# Altium PCB controller_V1.0.PcbDoc (part 4 of 8)
Units mm, origin at the board's own origin, x right, y up, seen from the top; angles counter-clockwise.
Board outline 284.13 x 175.13 mm, 4 copper layers (Top Layer, GND, VCC, Bottom Layer); 496 components, 415 nets, 1682 pads, 750 vias.
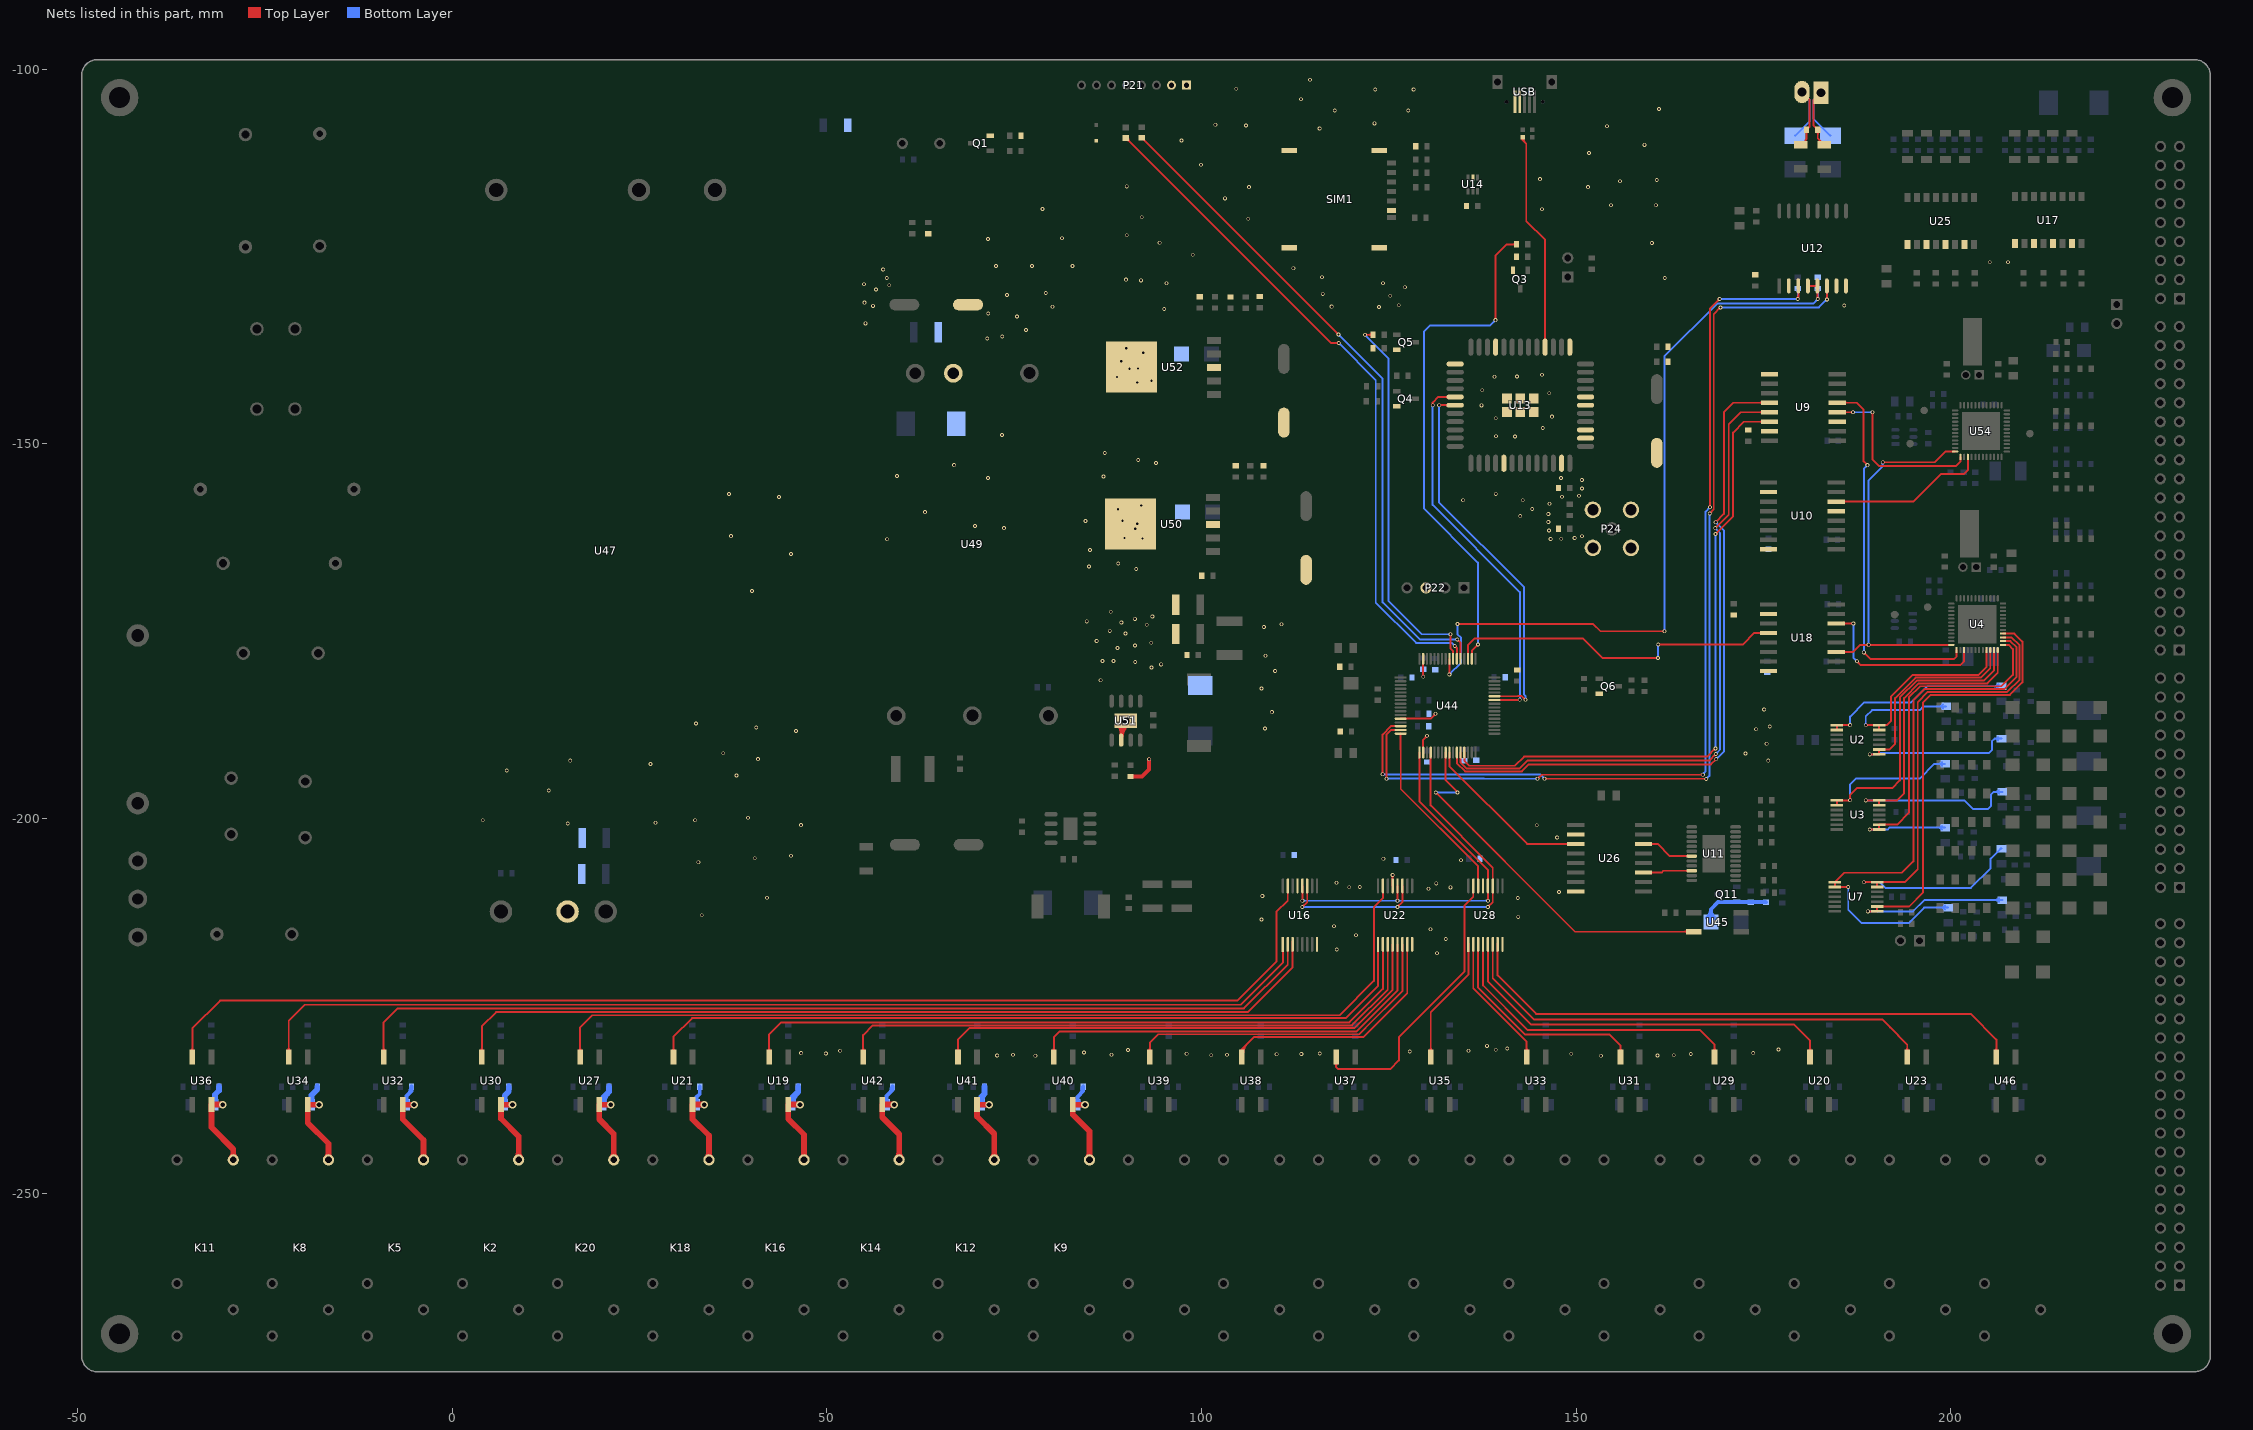
[diagram p6: the nets of this part, all layers, seen from the top]

## Via types
v1: diameter 0.508, hole 0.305, Top Layer to Bottom Layer, tented both sides, 596 vias
v2: diameter 1.016, hole 0.635, Top Layer to Bottom Layer, tented both sides, 65 vias
v3: diameter 0.6, hole 0.3, Top Layer to Bottom Layer, 50 vias
v4: diameter 0.762, hole 0.508, Top Layer to Bottom Layer, tented both sides, 29 vias
v5: diameter 2.032, hole 1.524, Top Layer to Bottom Layer, tented both sides, 4 vias
v6: diameter 3.048, hole 2.032, Top Layer to Bottom Layer, tented both sides, 3 vias
v7: diameter 1.5, hole 1, Top Layer to Bottom Layer, 2 vias
v8: diameter 2.54, hole 1.778, Top Layer to Bottom Layer, tented both sides, 1 vias

## Nets (pads, with @x,y where several pads share a name; then routed paths per layer and width w, separated by ;. In a path a pad name is that pad's centre, name@x,y a point inside that pad or via, vN(x,y) a via of type N, cw(c..) or ccw(c..) an arc to the next point about the centre after c; other vN are vias at no path point) (continued)
DO_10: C109.1 D66.2 K9.5 U40.4 | length 17
  Top Layer w0.762: U40.4@82.832,-238.176 82.832,-239.55 85.042,-241.76 K9.5@85.042,-245.567 ; U40.4@82.858,-238.201 v2(84.454,-238.201) ; K9.5@84.781,-245.306 ccw(c84.151,-244.676) 85.042,-244.676 ccw(c85.932,-244.676) K9.5@85.302,-245.306
  Bottom Layer w0.508: D66.2@83.294,-237.763 ccw(c82.96,-237.428) 83.433,-237.428 ccw(c83.906,-237.428) D66.2@83.571,-237.763 ; D66.2@83.433,-238.201 83.433,-237.191 84.223,-236.401 C109.1@84.223,-235.788 ; 83.702,-236.922 ccw(c82.675,-235.896) C109.1@84.127,-235.865
  Bottom Layer w0.762: D66.2@83.433,-238.201 v2(84.454,-238.201)
DO_11: C110.1 D67.2 K12.5 U41.4 | length 16.2
  Top Layer w0.762: U41.4@70.044,-238.176 70.044,-239.792 72.344,-242.092 K12.5@72.344,-245.567 ; U41.4@70.07,-238.201 v2(71.652,-238.201) ; K12.5@72.083,-245.306 ccw(c71.453,-244.676) 72.344,-244.676 ccw(c73.235,-244.676) K12.5@72.605,-245.306
  Bottom Layer w0.762: D67.2@70.699,-237.887 cw(c71.932,-237.623) 71.04,-236.732 ; C110.1@71.04,-235.788 71.04,-236.732 ; v2(71.652,-238.201) D67.2@70.631,-238.201 70.631,-237.141 71.04,-236.732
DO_12: C111.1 D68.2 K14.5 U42.4 | length 16.7
  Top Layer w0.762: v2@58.952,-238.176 U42.4@57.383,-238.176 57.383,-239.882 59.646,-242.145 K14.5@59.646,-245.567 ; K14.5@59.385,-245.306 ccw(c58.755,-244.676) 59.646,-244.676 ccw(c60.537,-244.676) K14.5@59.907,-245.306
  Bottom Layer w0.508: D68.2@57.818,-237.763 ccw(c57.483,-237.428) 57.957,-237.428 ccw(c58.43,-237.428) D68.2@58.095,-237.763 ; D68.2@57.957,-238.201 57.957,-237.039 58.747,-236.249 C111.1@58.747,-235.788 ; 58.31,-236.686 ccw(c57.487,-235.863) C111.1@58.651,-235.863
  Bottom Layer w0.762: D68.2@57.957,-238.201 v2(58.978,-238.201)
DO_13: C87.1 D50.2 K16.5 U19.4 | length 16.3
  Top Layer w0.762: v2@46.381,-238.176 U19.4@44.825,-238.176 44.825,-240.075 46.948,-242.198 K16.5@46.948,-245.567 ; K16.5@46.687,-245.306 ccw(c46.058,-244.676) 46.948,-244.676 ccw(c47.839,-244.676) K16.5@47.209,-245.306
  Bottom Layer w0.762: D50.2@45.455,-237.901 cw(c47.156,-237.901) 45.953,-236.698 ; C87.1@46.176,-235.788 46.176,-236.476 45.386,-237.266 D50.2@45.386,-238.201 v2(46.407,-238.201)
DO_14: C89.1 D77.2 K18.5 U21.4 | length 15.6
  Top Layer w0.762: v2(33.629,-238.201) 33.603,-238.176 U21.4@32.061,-238.176 32.061,-240.137 34.251,-242.327 K18.5@34.251,-245.567 ; K18.5@33.99,-245.306 ccw(c33.36,-244.676) 34.251,-244.676 ccw(c35.141,-244.676) K18.5@34.512,-245.306
  Bottom Layer w0.508: D77.2@32.469,-237.763 ccw(c32.134,-237.428) 32.607,-237.428 ccw(c33.081,-237.428) D77.2@32.746,-237.763 ; D77.2@32.607,-238.201 32.607,-237.191 33.016,-236.782 C89.1@33.016,-235.788
  Bottom Layer w0.762: D77.2@32.607,-238.201 v2(33.629,-238.201)
DO_15: C92.1 D54.2 K20.5 U27.4 | length 16.2
  Top Layer w0.762: U27.4@19.603,-238.176 19.603,-240.151 21.553,-242.101 K20.5@21.553,-245.567 ; U27.4@19.628,-238.201 v2(21.157,-238.201) ; K20.5@21.292,-245.306 ccw(c20.662,-244.676) 21.553,-244.676 ccw(c22.444,-244.676) K20.5@21.814,-245.306
  Bottom Layer w0.762: D54.2@20.205,-237.901 cw(c21.901,-237.901) 20.702,-236.702 ; C92.1@20.926,-235.788 20.926,-236.478 20.136,-237.268 D54.2@20.136,-238.201 v2(21.157,-238.201)
DO_16: C94.1 D56.2 K2.5 U30.4 | length 14.9
  Top Layer w0.762: U30.4@6.484,-238.176 6.484,-240.062 8.855,-242.434 K2.5@8.855,-245.567 ; U30.4@6.509,-238.201 v2(8.025,-238.201) ; K2.5@8.594,-245.306 ccw(c7.964,-244.676) 8.855,-244.676 ccw(c9.746,-244.676) K2.5@9.116,-245.306
  Bottom Layer w0.762: C94.1@7.54,-235.788 7.54,-236.427 7.004,-236.963 D56.2@7.004,-238.201 v2(8.025,-238.201)
DO_17: C97.1 D58.2 K5.5 U32.4 | length 16.9
  Top Layer w0.762: U32.4@-6.632,-238.176 -6.632,-240.129 -3.843,-242.918 K5.5@-3.843,-245.567 ; U32.4@-6.607,-238.201 v2(-5.104,-238.201) ; K5.5@-4.103,-245.306 ccw(c-4.733,-244.676) -3.843,-244.676 ccw(c-2.952,-244.676) K5.5@-3.582,-245.306
  Bottom Layer w0.508: D58.2@-6.264,-237.763 ccw(c-6.599,-237.428) -6.126,-237.428 ccw(c-5.652,-237.428) D58.2@-5.987,-237.763 ; D58.2@-6.126,-238.201 -6.126,-237.037 -5.463,-236.374 C97.1@-5.463,-235.788 ; -5.87,-236.782 ccw(c-6.644,-236.008) C97.1@-5.558,-235.875
  Bottom Layer w0.762: D58.2@-6.126,-238.201 v2(-5.104,-238.201)
DO_18: C101.1 D60.2 K8.5 U34.4 | length 15.2
  Top Layer w0.762: U34.4@-19.296,-238.176 -19.296,-240.648 -16.54,-243.403 K8.5@-16.54,-245.567 ; U34.4@-19.27,-238.201 v2(-17.781,-238.201) ; K8.5@-16.801,-245.306 ccw(c-17.431,-244.676) -16.54,-244.676 ccw(c-15.649,-244.676) K8.5@-16.279,-245.306
  Bottom Layer w0.762: C101.1@-18.012,-235.788 -18.012,-236.147 -18.802,-236.937 D60.2@-18.802,-238.201 v2(-17.781,-238.201)
DO_19: C103.1 D62.2 K11.5 U36.4 | length 15.2
  Top Layer w0.762: v2(-30.658,-238.201) -30.683,-238.176 U36.4@-32.159,-238.176 -32.159,-241.221 -29.238,-244.142 K11.5@-29.238,-245.567 ; K11.5@-29.499,-245.306 ccw(c-30.129,-244.676) -29.238,-244.676 ccw(c-28.347,-244.676) K11.5@-28.977,-245.306
  Bottom Layer w0.762: C103.1@-31.143,-235.788 -31.143,-236.324 -31.679,-236.86 D62.2@-31.679,-238.201 v2(-30.658,-238.201)
DO_CTRL_0: U28.7 U46.2 | length 77.7
  Top Layer w0.254: U28.7@139.533,-216.662 139.533,-220.94 144.678,-226.085 202.692,-226.085 206.109,-229.502 U46.2@206.109,-231.851 ; U46.2@205.929,-231.037 ccw(c205.495,-230.603) 206.109,-230.603 ccw(c206.722,-230.603) U46.2@206.288,-231.037
DO_CTRL_1: U23.2 U28.6 | length 69.1
  Top Layer w0.254: U28.6@138.883,-216.662 138.883,-221.357 144.348,-226.822 190.856,-226.822 191.922,-227.889 ; 193.904,-229.87 191.922,-227.889 ; U23.2@194.026,-231.037 ccw(c193.592,-230.603) 194.205,-230.603 ccw(c194.819,-230.603) U23.2@194.385,-231.037 ; U23.2@194.205,-231.851 194.205,-230.172 191.922,-227.889
DO_CTRL_2: U20.2 U28.5 | length 54.5
  Top Layer w0.254: U28.5@138.233,-216.662 138.233,-221.723 144.018,-227.508 179.095,-227.508 181.239,-229.651 U20.2@181.239,-231.851 ; U20.2@181.059,-231.037 ccw(c180.626,-230.603) 181.239,-230.603 ccw(c181.852,-230.603) U20.2@181.418,-231.037
DO_CTRL_3: U28.4 U29.2 | length 42.4
  Top Layer w0.254: U28.4@137.583,-216.662 137.583,-222.292 143.51,-228.219 166.522,-228.219 168.491,-230.188 U29.2@168.491,-231.851 ; U29.2@168.312,-231.037 ccw(c167.878,-230.603) 168.491,-230.603 ccw(c169.104,-230.603) U29.2@168.671,-231.037
DO_CTRL_4: U28.3 U31.2 | length 30.6
  Top Layer w0.254: U28.3@136.933,-216.662 136.933,-222.582 143.18,-228.829 154.457,-228.829 155.93,-230.301 U31.2@155.93,-231.851 ; U31.2@155.75,-231.037 ccw(c155.316,-230.603) 155.93,-230.603 ccw(c156.543,-230.603) U31.2@156.109,-231.037
DO_CTRL_5: U28.2 U33.2 | length 19.1
  Top Layer w0.254: U28.2@136.283,-216.662 136.283,-222.669 143.401,-229.786 U33.2@143.401,-231.851 ; U33.2@143.221,-231.037 ccw(c142.787,-230.603) 143.401,-230.603 ccw(c144.014,-230.603) U33.2@143.58,-231.037
DO_CTRL_6: U28.1 U35.2 | length 18.2
  Top Layer w0.254: U35.2@130.428,-231.037 ccw(c129.994,-230.603) 130.607,-230.603 ccw(c131.22,-230.603) U35.2@130.787,-231.037 ; U35.2@130.607,-231.851 130.607,-225.856 135.633,-220.83 U28.1@135.633,-216.789 U28.1@135.633,-216.662
DO_CTRL_7: U28.15 U37.2 | length 38.7
  Top Layer w0.254: U37.2@117.792,-232.666 cw(c117.358,-233.099) 117.971,-233.099 cw(c118.585,-233.099) U37.2@118.151,-232.666 ; U37.2@117.971,-231.851 117.971,-233.186 118.237,-233.451 125.171,-233.451 126.34,-232.283 126.34,-229.184 135.128,-220.396 135.128,-211.607 136.283,-210.452 U28.15@136.283,-208.989
DO_CTRL_8: U22.7 U38.2 | length 35.1
  Top Layer w0.254: U38.2@105.262,-230.982 ccw(c105.2,-230.833) 105.361,-230.833 ; U38.2@105.361,-231.851 105.361,-230.833 ; U38.2@105.361,-231.216 cw(c106.285,-231.216) 105.632,-230.563 ; U38.2@105.46,-230.982 cw(c105.522,-230.833) 105.361,-230.833 ; U38.2@105.615,-231.216 cw(c107.152,-231.216) 106.065,-230.129 ; U22.7@127.468,-216.789 127.468,-223.306 121.59,-229.184 117.196,-229.184 107.01,-229.184 105.361,-230.833
DO_CTRL_9: U22.6 U39.2 | length 45.7
  Top Layer w0.254: U39.2@92.926,-231.037 ccw(c92.493,-230.603) 93.106,-230.603 ccw(c93.719,-230.603) U39.2@93.286,-231.037 ; U39.2@93.106,-231.851 93.106,-229.906 94.209,-228.803 121.056,-228.803 121.768,-228.092 121.895,-227.965 126.818,-223.041 U22.6@126.818,-216.789
DO_CTRL_10: U22.5 U40.2 | length 58.2
  Top Layer w0.254: U40.2@80.113,-231.037 ccw(c79.679,-230.603) 80.292,-230.603 ccw(c80.906,-230.603) U40.2@80.472,-231.037 ; U40.2@80.292,-231.851 80.292,-229.232 81.102,-228.422 120.701,-228.422 121.539,-227.584 121.657,-227.466 126.168,-222.955 U22.5@126.168,-216.789
DO_CTRL_11: U22.4 U41.2 | length 70.2
  Top Layer w0.254: U41.2@67.325,-231.037 ccw(c66.891,-230.603) 67.504,-230.603 ccw(c68.117,-230.603) U41.2@67.684,-231.037 ; U41.2@67.504,-231.851 67.504,-229.489 69.003,-227.99 120.396,-227.99 125.518,-222.868 U22.4@125.518,-216.789
DO_CTRL_12: U22.3 U42.2 | length 82.5
  Top Layer w0.254: U42.2@54.663,-231.037 ccw(c54.23,-230.603) 54.843,-230.603 ccw(c55.456,-230.603) U42.2@55.023,-231.037 ; U42.2@54.843,-231.851 54.843,-228.905 56.138,-227.609 120.091,-227.609 124.868,-222.832 U22.3@124.868,-216.789
DO_CTRL_13: U19.2 U22.2 | length 94.4
  Top Layer w0.254: U19.2@42.106,-231.037 ccw(c41.672,-230.603) 42.285,-230.603 ccw(c42.899,-230.603) U19.2@42.465,-231.037 ; U19.2@42.285,-231.851 42.285,-228.829 43.886,-227.228 119.736,-227.228 124.218,-222.746 U22.2@124.218,-216.789
DO_CTRL_14: U21.2 U22.1 | length 106.1
  Top Layer w0.254: U21.2@29.341,-231.037 ccw(c28.907,-230.603) 29.521,-230.603 ccw(c30.134,-230.603) U21.2@29.7,-231.037 ; U21.2@29.521,-231.851 29.521,-229.133 32.01,-226.644 119.253,-226.644 123.568,-222.329 U22.1@123.568,-216.789
DO_CTRL_15: U22.15 U27.2 | length 126.7
  Top Layer w0.254: U27.2@16.883,-231.037 ccw(c16.449,-230.603) 17.063,-230.603 ccw(c17.676,-230.603) U27.2@17.242,-231.037 ; U27.2@17.063,-231.851 17.063,-229.083 17.063,-227.863 18.663,-226.263 118.44,-226.263 123.012,-221.691 123.012,-211.836 124.218,-210.63 U22.15@124.218,-208.989
DO_CTRL_16: U16.3 U30.2 | length 120
  Top Layer w0.254: U30.2@3.764,-231.037 ccw(c3.331,-230.603) 3.944,-230.603 ccw(c4.557,-230.603) U30.2@4.124,-231.037 ; U30.2@3.944,-231.851 3.944,-227.736 5.849,-225.831 106.172,-225.831 112.168,-219.835 U16.3@112.168,-216.789 U16.3@112.168,-216.408
DO_CTRL_17: U16.2 U32.2 | length 132.6
  Top Layer w0.254: U32.2@-9.352,-231.037 ccw(c-9.786,-230.603) -9.172,-230.603 ccw(c-8.559,-230.603) U32.2@-8.993,-231.037 ; U32.2@-9.172,-231.851 -9.172,-227.206 -7.315,-225.349 105.664,-225.349 111.518,-219.494 U16.2@111.518,-216.789 U16.2@111.518,-216.408
DO_CTRL_18: U16.1 U34.2 | length 144.5
  Top Layer w0.254: U34.2@-22.015,-231.037 ccw(c-22.449,-230.603) -21.836,-230.603 ccw(c-21.222,-230.603) U34.2@-21.656,-231.037 ; U34.2@-21.836,-231.851 -21.836,-227.017 -19.685,-224.866 105.232,-224.866 110.868,-219.23 U16.1@110.868,-216.789 U16.1@110.868,-216.408
DO_CTRL_19: U16.15 U36.2 | length 163.9
  Top Layer w0.254: U36.2@-34.879,-231.037 ccw(c-35.312,-230.603) -34.699,-230.603 ccw(c-34.086,-230.603) U36.2@-34.519,-231.037 ; U36.2@-34.699,-231.851 -34.699,-228.018 -30.988,-224.307 104.8,-224.307 110.012,-219.096 110.012,-212.467 111.518,-210.96 U16.15@111.518,-208.989
DOUT: U4.24 U18.11 U54.24 | length 54.9
  Top Layer w0.254: U18.11@184.732,-177.775 186.969,-177.775 187.928,-176.816 v1(189.052,-176.816) 190.449,-176.816 ; U18.11@185.716,-177.882 cw(c185.976,-178.143) 185.976,-177.775 cw(c185.976,-177.407) U18.11@185.716,-177.667 ; v1@188.962,-176.906 ccw(c188.746,-177.123) 188.746,-176.816 ccw(c188.746,-176.51) v1@188.962,-176.726 ; v1@189.142,-176.906 cw(c189.359,-177.123) 189.359,-176.816 cw(c189.359,-176.51) v1@189.142,-176.726 ; 189.985,-176.816 190.449,-176.816 ; v1(190.932,-152.451) 197.898,-152.451 199.314,-151.035 U54.24@200.603,-151.035 ; v1@191.022,-152.541 cw(c191.238,-152.757) 191.238,-152.451 cw(c191.238,-152.144) v1@191.022,-152.361 ; 196.628,-176.816 196.926,-176.816 ; U4.24@200.095,-176.816 196.926,-176.816 ; 190.449,-176.816 196.926,-176.816
  Bottom Layer w0.254: v1@188.962,-176.726 ccw(c188.746,-176.51) 189.052,-176.51 ccw(c189.359,-176.51) v1@189.142,-176.726 ; v1(189.052,-176.816) 189.052,-154.864 190.932,-152.984 v1(190.932,-152.451) ; v1@190.842,-152.541 cw(c190.625,-152.757) 190.932,-152.757 cw(c191.238,-152.757) v1@191.022,-152.541
DOUT_AO: U11.10 U26.11 | length 7.5
  Top Layer w0.254: U26.11@159.001,-207.213 161.417,-207.213 161.657,-206.974 U11.10@165.449,-206.974 ; U26.11@159.985,-207.321 cw(c160.246,-207.581) 160.246,-207.213 cw(c160.246,-206.845) U26.11@159.985,-207.105 ; U11.10@164.88,-207.043 ccw(c164.712,-207.21) 164.712,-206.974 ccw(c164.712,-206.737) U11.10@164.88,-206.904
DP: R9.2 U13.4 | length 32.1
  Top Layer w0.254: R9.2@142.798,-109.067 ccw(c143.164,-109.191) 142.891,-109.465 ; R9.2@142.875,-109.093 142.875,-109.449 ; R9.2@143.039,-109.149 ccw(c143.595,-109.338) 143.18,-109.753 ; U13.4@145.728,-136.116 ccw(c145.39,-135.778) 145.868,-135.778 ccw(c146.346,-135.778) U13.4@146.008,-136.116 ; U13.4@145.868,-137.081 145.868,-122.779 143.358,-120.269 143.358,-109.931 142.875,-109.449 ; 142.875,-109.449 ccw(c142.596,-109.449) 142.768,-109.229 cw(c142.596,-109.449) 142.875,-109.449 ; 142.875,-109.449 cw(c143.154,-109.449) 142.982,-109.229 ccw(c143.154,-109.449) 142.875,-109.449
GND: C41.1 C42.2 C44.2 C45.1 C57.2 C73.2 C113.2 C114.1 C115.1 C116.2 C117.2 C118.1 C119.1 C120.1 C122.1 C123.1 C124.1 C125.1 C126.1 C127.1 C128.1 C132.1 C134.1 C135.1 C136.1 C140.1 C141.1 C142.2 C143.2 C144.2 C145.2 C146.1 C147.1 C161.1 C163.1 C166.1 C168.1 C169.2 D22.1 D26.1 D69.1 D70.1 D71.1 E147.2 LED2.2 LED17.2 P21.1 P21.2 P22.3 P24.2 P24.3 P24.4 P24.5 Q1.2 Q3.2 Q4.2 Q5.2 Q6.2 R22.2 R76.2 R163.1 R166.1 R172.2 R181.1 R183.1 R186.1 SIM1.0 SIM1.5 U9.9 U9.15 U10.2 U10.8 U12.2 U12.7 U12.8 U13.1 U13.10 U13.27 U13.34 U13.36 U13.37 U13.40 U13.41 U13.89 U13.90 U13.91 U13.92 U13.93 U13.94 U13.95 U14.2 U16.8 U16.13 U17.9 U17.11 U17.13 U17.15 U18.2 U18.8 U22.8 U22.13 U25.9 U25.11 U25.13 U25.15 U26.2 U26.8 U28.8 U28.13 U44.12 U44.18 U44.63 U47.5 U49.2 U50.3 U50.6 U51.6 U51.9 U52.3 U52.6 USB.4 USB.5 | length 27.1
  Top Layer w0.254: U51.9@89.278,-187.573 v7(89.913,-186.938) ; v1@125.429,-207.641 cw(c125.212,-207.857) 125.518,-207.857 cw(c125.825,-207.857) v1@125.608,-207.641 ; U22.13@125.518,-208.989 v1(125.518,-207.551) ; U44.12@126.591,-186.678 126.599,-186.67 128.003,-186.67 128.011,-186.678 130.593,-186.678 v1(131.242,-186.03) ; v1@129.501,-180.987 ccw(c129.284,-180.77) 129.591,-180.77 ccw(c129.898,-180.77) v1@129.681,-180.987 ; U44.18@129.591,-191.178 129.583,-191.17 129.583,-189.492 v1(130.112,-188.963) ; v1(129.591,-181.076) U44.63@129.591,-178.678 ; v1@129.984,-188.963 cw(c129.678,-188.963) 129.895,-189.18 cw(c130.112,-189.397) v1@130.112,-189.09 ; v1@131.115,-186.03 cw(c130.808,-186.03) 131.025,-186.246 cw(c131.242,-186.463) v1@131.242,-186.157
  Top Layer w0.508: U51.9@88.871,-187.43 cw(c87.888,-188.413) 89.278,-188.413 ; U51.6@89.278,-189.614 cw(c92.514,-189.614) U51.9@90.259,-187.294 ; U51.6@89.278,-189.538 U51.9@89.278,-187.573 ; U51.6@89.278,-188.824 cw(c91.249,-188.824) U51.9@89.856,-187.43 ; 89.278,-188.412 cw(c91.346,-188.412) U51.9@89.905,-186.93 ; C140.1@90.523,-194.386 92.075,-194.386 93.015,-193.446 v1(93.015,-192.1)
  other v1: 77.826,-231.673 153.314,-231.673 72.72,-231.623 160.858,-231.623 101.295,-231.597 163.043,-231.597 74.854,-231.546 87.986,-231.546 103.403,-231.546 110.033,-231.47 113.335,-231.445 165.303,-231.445 98.019,-231.394 149.352,-231.394 49.86,-231.369 115.799,-231.369 46.558,-231.318 173.66,-231.318 84.328,-231.242 127.813,-231.115 51.765,-231.013 135.636,-231.013 90.195,-230.911 139.294,-230.861 177.038,-230.835 140.818,-230.708 138.1,-230.353 131.445,-217.983 118.059,-217.5 132.613,-216.078 120.625,-215.595 130.581,-214.782 117.704,-214.376 108.001,-213.487 142.291,-213.131 33.299,-212.903 142.215,-210.617 42.012,-210.591 108.128,-210.337 147.726,-209.804 130.302,-209.372 133.248,-209.194 119.736,-209.169 121.133,-209.144 131.343,-208.661 118.034,-208.585 32.842,-205.842 134.643,-205.563 124.282,-205.384 40.361,-205.308 45.212,-204.978 147.472,-202.54 144.755,-200.914 46.533,-200.889 15.418,-200.66 27.127,-200.558 4.064,-200.228 32.41,-200.228 39.472,-199.898 12.878,-196.266 37.922,-194.259 7.264,-193.599 26.467,-192.735 15.748,-192.278 175.666,-192.278 40.792,-192.075 172.618,-191.313 36.17,-191.287 175.438,-190.017 45.872,-188.316 174.041,-188.087 108.483,-187.985 40.564,-187.858 175.844,-187.706 32.512,-187.325 109.398,-185.801 175.108,-185.445 108.026,-182.651 86.538,-181.534 109.83,-180.315 93.32,-179.857 94.615,-179.426 91.161,-179.121 86.792,-178.968 88.265,-178.968 108.56,-178.283 88.798,-177.241 91.135,-176.911 93.294,-176.53 86.004,-176.301 89.865,-175.311 87.757,-174.955 108.331,-174.447 92.685,-174.142 110.668,-174.066 89.306,-173.838 84.684,-173.685 91.11,-173.355 93.447,-173.025 87.884,-172.39 40.005,-169.647 91.288,-166.7 84.988,-166.37 88.9,-165.964 45.212,-164.694 85.115,-164.16 58.039,-162.712 146.609,-162.687 148.031,-162.662 92.126,-162.636 89.738,-162.56 149.809,-162.56 150.8,-162.331 37.211,-162.306 146.38,-161.544 91.161,-161.315 73.635,-161.239 69.774,-160.96 91.44,-160.655 146.304,-160.426 84.531,-160.299 89.459,-160.249 142.545,-159.639 146.304,-159.36 63.094,-159.106 88.849,-158.725 144.145,-158.674 91.948,-158.217 146.456,-157.988 134.925,-157.531 142.875,-157.531 43.612,-157.099 148.133,-157.048 150.393,-156.921 36.932,-156.693 139.268,-156.667 150.8,-155.956 150.774,-154.813 71.501,-154.559 147.98,-154.559 86.919,-154.356 59.36,-154.28 66.98,-152.832 93.929,-152.552 91.567,-152.146 87.097,-151.206 141.859,-148.996 139.319,-148.971 73.381,-148.819 145.542,-147.879 139.294,-146.583 146.787,-146.355 137.389,-144.856 146.431,-143.231 137.49,-142.824 91.44,-141.808 93.32,-141.58 88.722,-141.072 139.116,-141.021 142.113,-140.995 145.44,-140.767 90.394,-139.966 91.516,-139.929 89.306,-138.963 92.227,-137.846 89.967,-137.211 71.399,-135.915 73.406,-135.661 76.581,-134.798 55.143,-133.909 75.387,-132.994 71.526,-132.588 95.021,-131.978 123.698,-131.724 80.112,-131.699 117.373,-131.674 56.159,-131.572 185.801,-131.521 126.34,-131.496 55.016,-131.14 125.197,-130.226 74.041,-130.124 116.18,-129.972 79.223,-129.845 56.566,-129.388 127.152,-129.083 58.318,-128.829 54.966,-128.676 95.326,-128.549 124.231,-128.549 91.923,-128.168 89.916,-128.067 161.849,-127.864 57.988,-127.838 116.078,-127.762 57.506,-126.721 112.268,-126.543 72.568,-126.263 77.368,-126.263 82.779,-126.263 205.232,-125.755 207.67,-125.755 98.831,-124.739 160.122,-123.19 94.412,-123.139 71.501,-122.657 81.382,-122.555 90.018,-122.149 106.248,-119.939 92.024,-119.736 145.44,-118.669 78.791,-118.643 154.661,-118.135 160.655,-118.135 103.149,-117.221 106.35,-115.722 151.587,-115.722 90.018,-115.621 155.854,-114.935 160.782,-114.783 145.186,-114.656 99.924,-112.725 151.714,-111.176 159.131,-110.084 97.333,-109.499 115.773,-107.899 154.127,-107.594 105.943,-107.493 101.854,-107.391 123.088,-107.213 117.78,-105.486 127.61,-105.486 161.061,-105.283 113.284,-103.988 123.19,-102.692 128.321,-102.692 104.648,-102.591 114.478,-101.397
IN_RCK: U16.12 U22.12 U28.12 U44.17 | length 55.7
  Top Layer w0.254: v1@113.379,-210.886 ccw(c113.162,-210.67) 113.468,-210.67 ccw(c113.775,-210.67) v1@113.558,-210.886 ; v1(113.468,-210.976) U16.12@113.468,-208.989 ; v1@126.079,-210.886 ccw(c125.862,-210.67) 126.168,-210.67 ccw(c126.475,-210.67) v1@126.258,-210.886 ; v1(126.168,-210.976) U22.12@126.168,-208.989 ; U44.17@129.091,-191.178 129.091,-197.722 138.233,-206.864 U28.12@138.233,-208.989 v1(138.233,-210.976) ; v1@138.144,-210.886 ccw(c137.927,-210.67) 138.233,-210.67 ccw(c138.54,-210.67) v1@138.323,-210.886
  Bottom Layer w0.254: v1(113.468,-210.976) v1(126.168,-210.976) v1(138.233,-210.976) ; v1@113.558,-211.066 cw(c113.775,-211.283) 113.775,-210.976 cw(c113.775,-210.67) v1@113.558,-210.886 ; v1@126.079,-211.066 ccw(c125.862,-211.283) 125.862,-210.976 ccw(c125.862,-210.67) v1@126.079,-210.886 ; v1@126.258,-211.066 cw(c126.475,-211.283) 126.475,-210.976 cw(c126.475,-210.67) v1@126.258,-210.886 ; v1@138.144,-211.066 ccw(c137.927,-211.283) 137.927,-210.976 ccw(c137.927,-210.67) v1@138.144,-210.886
IN_SCK: U16.11 U22.11 U28.11 U44.20 | length 58.7
  Top Layer w0.254: v1(113.462,-211.811) 114.118,-211.154 U16.11@114.118,-208.989 ; v1@113.462,-211.684 ccw(c113.462,-211.377) 113.679,-211.594 ccw(c113.895,-211.811) v1@113.589,-211.811 ; v1(126.162,-211.811) 126.818,-211.154 U22.11@126.818,-208.989 ; v1@126.162,-211.684 ccw(c126.162,-211.377) 126.379,-211.594 ccw(c126.595,-211.811) v1@126.289,-211.811 ; U44.20@130.591,-191.178 130.583,-191.186 130.583,-195.441 130.591,-195.449 130.591,-196.055 130.583,-196.063 130.583,-198.249 138.883,-206.549 U28.11@138.883,-208.989 138.883,-211.154 v1(138.227,-211.811) ; v1@138.227,-211.684 ccw(c138.227,-211.377) 138.444,-211.594 ccw(c138.66,-211.811) v1@138.354,-211.811
  Bottom Layer w0.254: v1(113.462,-211.811) v1(126.162,-211.811) v1(138.227,-211.811) ; v1@113.552,-211.9 cw(c113.768,-212.117) 113.768,-211.811 cw(c113.768,-211.504) v1@113.552,-211.721 ; v1@126.072,-211.9 ccw(c125.855,-212.117) 125.855,-211.811 ccw(c125.855,-211.504) v1@126.072,-211.721 ; v1@126.252,-211.9 cw(c126.468,-212.117) 126.468,-211.811 cw(c126.468,-211.504) v1@126.252,-211.721 ; v1@138.137,-211.9 ccw(c137.92,-212.117) 137.92,-211.811 ccw(c137.92,-211.504) v1@138.137,-211.721
IN_SI: U28.14 U44.16 | length 25.7
  Top Layer w0.254: U44.16@126.591,-188.678 126.591,-190.777 126.594,-190.779 ; 126.594,-189.636 126.594,-190.779 ; U28.14@136.933,-208.989 136.933,-206.402 126.594,-196.063 126.594,-190.779
IO0: U44.24 U45.2 | length 54
  Top Layer w0.254: v1@131.267,-196.647 cw(c131.267,-196.953) 131.484,-196.737 cw(c131.701,-196.52) v1@131.394,-196.52 ; v1(131.267,-196.52) 149.86,-215.113 U45.2@165.707,-215.113 ; U44.24@132.591,-191.178 132.591,-194.897 134.201,-196.507 v1@134.214,-196.52 ; 133.953,-196.26 cw(c133.693,-196.52) v1@134.061,-196.52 ; 134.015,-196.321 ccw(c134.188,-196.148) v1@134.188,-196.393 ; U45.2@164.892,-215.292 ccw(c164.459,-215.726) 164.459,-215.113 ccw(c164.459,-214.499) U45.2@164.892,-214.933
  Bottom Layer w0.254: v1(131.267,-196.52) v1(134.188,-196.52) v1@134.214,-196.52 ; v1@131.357,-196.61 cw(c131.574,-196.826) 131.574,-196.52 cw(c131.574,-196.213) v1@131.357,-196.43 ; v1@134.098,-196.61 ccw(c133.882,-196.826) 133.882,-196.52 ccw(c133.882,-196.213) v1@134.098,-196.43
IOUT0: C112.2 D8.1 Q11.2 R72.2 | length 12.2
  Bottom Layer w0.508: D8.1@167.482,-213.299 ccw(c166.373,-212.118) 167.993,-212.118 ; D8.1@167.993,-213.843 167.993,-212.118 ; D8.1@168.504,-213.299 cw(c169.613,-212.118) 167.993,-212.118 ; C112.2@175.359,-211.176 175.327,-211.144 Q11.2@171.422,-211.144 168.967,-211.144 167.993,-212.118
LATCH_AO: U11.7 U26.14 | length 8.1
  Top Layer w0.254: U26.14@159.001,-203.403 160.884,-203.403 162.504,-205.024 U11.7@165.449,-205.024 ; U26.14@159.985,-203.511 cw(c160.246,-203.771) 160.246,-203.403 cw(c160.246,-203.035) U26.14@159.985,-203.295 ; U11.7@164.88,-205.093 ccw(c164.712,-205.26) 164.712,-205.024 ccw(c164.712,-204.787) U11.7@164.88,-204.954
LATCH_AO_MCU: U26.3 U44.25 | length 23.6
  Top Layer w0.254: U44.25@133.091,-191.178 133.091,-193.035 143.459,-203.403 U26.3@149.959,-203.403 ; U26.3@148.975,-203.511 ccw(c148.715,-203.771) 148.715,-203.403 ccw(c148.715,-203.035) U26.3@148.975,-203.295
LCD_RX: R167.1 U44.53 | length 92
  Top Layer w0.254: R167.1@92.024,-109.131 v1(118.3,-135.407) ; v1@118.173,-135.407 ccw(c117.867,-135.407) 118.084,-135.191 ccw(c118.3,-134.974) v1@118.3,-135.28 ; v1@134.137,-176.225 cw(c134.137,-176.532) 134.354,-176.315 cw(c134.571,-176.098) v1@134.264,-176.098 ; v1(134.137,-176.098) 134.591,-176.552 U44.53@134.591,-178.678
  Bottom Layer w0.254: v1@118.3,-135.534 cw(c118.3,-135.841) 118.517,-135.624 cw(c118.734,-135.407) v1@118.428,-135.407 ; v1(118.3,-135.407) 124.181,-141.287 124.181,-171.145 129.134,-176.098 133.883,-176.098 v1(134.137,-176.098) ; v1@134.048,-176.188 ccw(c133.831,-176.405) 133.831,-176.098 ccw(c133.831,-175.792) v1@134.048,-176.008
LCD_TX: R21.1 U44.54 | length 94.1
  Top Layer w0.254: R21.1@89.913,-109.156 117.282,-136.525 v1(118.313,-136.525) ; R21.1@89.977,-109.41 cw(c89.977,-109.87) 90.302,-109.545 ; R21.1@90.231,-109.156 ccw(c90.997,-109.156) 90.455,-109.699 ; v1@118.223,-136.615 ccw(c118.007,-136.832) 118.007,-136.525 ccw(c118.007,-136.218) v1@118.223,-136.435 ; v1@133.807,-177.089 cw(c133.807,-177.395) 134.024,-177.179 cw(c134.241,-176.962) v1@133.934,-176.962 ; v1(133.807,-176.962) 134.091,-177.246 U44.54@134.091,-178.678
  Bottom Layer w0.254: v1@118.313,-136.652 cw(c118.313,-136.959) 118.53,-136.742 cw(c118.747,-136.525) v1@118.44,-136.525 ; v1(118.313,-136.525) 123.266,-141.478 123.266,-171.171 128.651,-176.555 133.401,-176.555 v1(133.807,-176.962) ; v1@133.68,-176.962 ccw(c133.374,-176.962) 133.59,-176.745 ccw(c133.807,-176.528) v1@133.807,-176.835
LTE_MRX: U13.17 U44.42 | length 53.7
  Top Layer w0.254: v1@130.771,-144.741 ccw(c130.554,-144.524) 130.861,-144.524 ccw(c131.167,-144.524) v1@130.951,-144.741 ; v1(130.861,-144.831) 130.861,-144.475 131.605,-143.731 U13.17@133.868,-143.731 ; U13.17@132.903,-143.871 ccw(c132.565,-144.209) 132.565,-143.731 ccw(c132.565,-143.253) U13.17@132.903,-143.591 ; U44.42@139.091,-184.178 142.466,-184.178 v1(142.494,-184.15) ; 142.119,-184.178 ccw(c142.119,-183.775) v1@142.404,-184.06
  Bottom Layer w0.254: v1@130.771,-144.921 cw(c130.554,-145.137) 130.861,-145.137 cw(c131.167,-145.137) v1@130.951,-144.921 ; v1(130.861,-144.831) 130.861,-158.14 142.494,-169.774 v1(142.494,-184.15) ; v1@142.404,-184.06 ccw(c142.187,-183.843) 142.494,-183.843 ccw(c142.801,-183.843) v1@142.584,-184.06
LTE_MTX: U13.18 U44.43 | length 53.2
  Top Layer w0.254: v1(131.724,-144.831) U13.18@133.868,-144.831 ; v1@131.814,-144.921 cw(c132.031,-145.137) 132.031,-144.831 cw(c132.031,-144.524) v1@131.814,-144.741 ; U13.18@132.903,-144.971 ccw(c132.565,-145.309) 132.565,-144.831 ccw(c132.565,-144.353) U13.18@132.903,-144.691 ; U44.43@139.127,-183.642 U44.43@139.091,-183.678 142.247,-183.678 142.284,-183.642 142.704,-183.642 143.212,-184.15 v1(143.256,-184.15) ; 142.965,-183.902 ccw(c143.256,-183.611) v1@143.256,-184.023
  Bottom Layer w0.254: v1@131.635,-144.921 cw(c131.418,-145.137) 131.724,-145.137 cw(c132.031,-145.137) v1@131.814,-144.921 ; v1(131.724,-144.831) 131.724,-157.836 143.053,-169.164 143.053,-183.464 143.256,-183.667 v1(143.256,-184.15) ; v1@143.166,-184.06 ccw(c142.949,-183.843) 143.256,-183.843 ccw(c143.563,-183.843) v1@143.346,-184.06
LTE_PWR_CTRL: R162.1 U44.50 | length 72
  Top Layer w0.254: U44.50@136.091,-178.678 136.091,-177.599 v1(136.906,-176.784) ; v1@136.779,-176.784 cw(c136.472,-176.784) 136.689,-177.001 cw(c136.906,-177.218) v1@136.906,-176.911 ; v1@139.153,-133.387 ccw(c138.936,-133.17) 139.243,-133.17 ccw(c139.549,-133.17) v1@139.333,-133.387 ; v1(139.243,-133.477) 139.243,-124.866 140.741,-123.368 R162.1@142.06,-123.368 ; R162.1@141.902,-123.525 ccw(c141.521,-123.906) 141.521,-123.368 ccw(c141.521,-122.829) R162.1@141.902,-123.21
  Bottom Layer w0.254: v1@136.816,-176.694 ccw(c136.599,-176.477) 136.906,-176.477 ccw(c137.213,-176.477) v1@136.996,-176.694 ; v1(136.906,-176.784) 136.906,-165.837 129.718,-158.648 129.718,-134.976 130.48,-134.214 138.506,-134.214 v1(139.243,-133.477) ; v1@139.116,-133.477 cw(c138.809,-133.477) 139.026,-133.694 cw(c139.243,-133.911) v1@139.243,-133.604
LTE_RST: R165.1 U44.55 | length 54.2
  Top Layer w0.254: v1(121.818,-135.433) R165.1@122.883,-135.433 ; v1@121.908,-135.523 cw(c122.125,-135.739) 122.125,-135.433 cw(c122.125,-135.126) v1@121.908,-135.343 ; R165.1@122.725,-135.59 ccw(c122.344,-135.971) 122.344,-135.433 ccw(c122.344,-134.894) R165.1@122.725,-135.275 ; v1@133.159,-175.502 cw(c132.942,-175.719) 133.248,-175.719 cw(c133.555,-175.719) v1@133.338,-175.502 ; v1(133.248,-175.412) 133.248,-177.343 133.591,-177.685 U44.55@133.591,-178.678
  Bottom Layer w0.254: v1@121.818,-135.56 cw(c121.818,-135.866) 122.035,-135.65 cw(c122.252,-135.433) v1@121.945,-135.433 ; v1(121.818,-135.433) 124.959,-138.573 124.959,-170.942 129.429,-175.412 v1(133.248,-175.412) ; v1@133.159,-175.502 ccw(c132.942,-175.719) 132.942,-175.412 ccw(c132.942,-175.106) v1@133.159,-175.323
MAIN0: C5.2 U2.8 U2.9 | length 27.8
  Top Layer w0.254: U2.9@184.808,-188.192 U2.8@184.808,-187.542 186.585,-187.542 v1(186.588,-187.539) ; 186.273,-187.542 ccw(c186.273,-187.223) v1@186.499,-187.449 ; 186.291,-187.542 cw(c186.291,-187.836) v1@186.499,-187.628
  Bottom Layer w0.254: v1@186.499,-187.449 ccw(c186.282,-187.232) 186.588,-187.232 ccw(c186.895,-187.232) v1@186.678,-187.449 ; v1(186.588,-187.539) 186.588,-186.411 188.493,-184.506 194.716,-184.506 196.869,-182.353 C5.2@206.781,-182.353 ; C5.2@206.368,-182.617 ccw(c205.731,-183.254) 205.731,-182.353 ccw(c205.731,-181.453) C5.2@206.368,-182.089
MAIN1: C13.2 U2.6 U2.7 U4.33 | length 39
  Top Layer w0.254: v1(188.666,-187.546) 188.67,-187.542 U2.7@190.447,-187.542 ; v1@188.756,-187.636 cw(c188.982,-187.862) 188.982,-187.542 ; v1@188.756,-187.456 ccw(c188.963,-187.249) 188.963,-187.542 ; U2.6@190.447,-188.192 U2.7@190.447,-187.542 ; U4.33@204.795,-177.516 204.795,-179.761 203.733,-180.823 194.97,-180.823 192.024,-183.769 192.024,-186.995 191.476,-187.542 U2.7@190.447,-187.542
  Bottom Layer w0.254: v1@188.576,-187.456 ccw(c188.359,-187.24) 188.666,-187.24 ccw(c188.973,-187.24) v1@188.756,-187.456 ; v1(188.666,-187.546) 188.666,-186.365 189.509,-185.522 195.859,-185.522 196.352,-185.029 C13.2@199.413,-185.029 ; C13.2@198.999,-185.292 ccw(c198.362,-185.929) 198.362,-185.029 ccw(c198.362,-184.128) C13.2@198.999,-184.765
MAIN2: C3.2 U2.1 U2.2 U4.34 | length 48.4
  Top Layer w0.254: v1(189.207,-191.442) U2.1@190.447,-191.442 U2.2@190.447,-190.792 191.808,-190.792 192.583,-190.017 192.583,-183.941 195.321,-181.204 204.025,-181.204 205.295,-179.934 U4.34@205.295,-177.516 ; v1@189.297,-191.532 cw(c189.514,-191.749) 189.514,-191.442 cw(c189.514,-191.136) v1@189.297,-191.353
  Bottom Layer w0.254: v1(189.207,-191.442) 190.447,-191.442 190.652,-191.237 205.161,-191.237 205.511,-190.886 205.511,-189.713 205.877,-189.347 ; v1@189.297,-191.532 cw(c189.514,-191.749) 189.514,-191.442 cw(c189.514,-191.136) v1@189.297,-191.353 ; C3.2@206.335,-189.573 ccw(c205.877,-189.922) 205.877,-189.347 ; C3.2@206.335,-189.12 cw(c205.877,-188.771) 205.877,-189.347 ; C3.2@206.781,-189.347 205.877,-189.347
MAIN3: C21.2 U3.8 U3.9 U4.35 | length 57.3
  Top Layer w0.254: U3.9@184.808,-198.225 U3.8@184.808,-197.575 v1@186.585,-197.575 ; 186.273,-197.575 ccw(c186.273,-197.256) 186.499,-197.482 ccw(c186.291,-197.274) 186.585,-197.274 ; 186.291,-197.575 cw(c186.291,-197.869) v1@186.499,-197.661 ; 186.585,-197.256 ccw(c186.904,-197.256) v1@186.678,-197.482 ; v1(186.588,-197.572) v1@186.585,-197.575 ; U4.35@205.795,-177.516 205.795,-180.188 204.398,-181.585 195.478,-181.585 193.218,-183.845 193.218,-194.92 192.202,-195.936 187.474,-195.936 186.585,-196.825 v1@186.585,-197.575
  Bottom Layer w0.254: v1@186.499,-197.482 ccw(c186.282,-197.265) 186.588,-197.265 ccw(c186.895,-197.265) v1@186.678,-197.482 ; v1(186.588,-197.572) 186.588,-195.428 187.35,-194.666 195.859,-194.666 197.805,-192.72 C21.2@199.288,-192.72 ; C21.2@198.875,-192.983 ccw(c198.238,-193.62) 198.238,-192.72 ccw(c198.238,-191.819) C21.2@198.875,-192.456
MAIN4: C4.2 U3.6 U3.7 U4.36 | length 58.8
  Top Layer w0.254: v1(188.666,-197.579) 188.67,-197.575 U3.7@190.447,-197.575 ; v1@188.756,-197.669 cw(c188.982,-197.895) 188.982,-197.575 ; v1@188.756,-197.489 ccw(c188.963,-197.282) 188.963,-197.575 ; U3.6@190.447,-198.225 U3.7@190.447,-197.575 ; U4.36@206.295,-177.516 206.295,-180.569 204.898,-181.966 195.767,-181.966 193.802,-183.931 193.802,-196.647 192.873,-197.575 U3.7@190.447,-197.575
  Bottom Layer w0.254: v1(188.666,-197.579) 201.821,-197.579 202.971,-198.73 205.003,-198.73 205.384,-198.349 205.384,-196.825 205.759,-196.45 C4.2@206.906,-196.45 ; v1@188.756,-197.669 cw(c188.973,-197.886) 188.973,-197.579 cw(c188.973,-197.273) v1@188.756,-197.489 ; C4.2@206.492,-196.714 ccw(c205.855,-197.351) 205.855,-196.45 ccw(c205.855,-195.55) C4.2@206.492,-196.186
MAIN5: C12.2 U3.1 U3.2 U4.37 | length 54.6
  Top Layer w0.254: v1(189.207,-201.475) U3.1@190.447,-201.475 U3.2@190.447,-200.825 192.113,-200.825 192.849,-200.825 194.437,-199.238 194.437,-183.834 195.925,-182.347 206.781,-182.347 208.305,-180.823 208.305,-177.394 207.728,-176.816 U4.37@206.995,-176.816 ; v1@189.297,-201.565 cw(c189.514,-201.782) 189.514,-201.475 cw(c189.514,-201.169) v1@189.297,-201.386
  Bottom Layer w0.254: v1(189.207,-201.475) 191.59,-201.475 191.836,-201.229 C12.2@199.288,-201.229 ; v1@189.297,-201.565 cw(c189.514,-201.782) 189.514,-201.475 cw(c189.514,-201.169) v1@189.297,-201.386 ; C12.2@198.875,-201.492 ccw(c198.238,-202.129) 198.238,-201.229 ccw(c198.238,-200.328) C12.2@198.875,-200.965
MAIN6: C29.2 U4.39 U7.6 U7.7 | length 75.5
  Top Layer w0.254: v1(188.412,-208.501) 188.416,-208.497 U7.7@190.193,-208.497 ; v1@188.502,-208.591 cw(c188.728,-208.817) 188.728,-208.497 ; v1@188.502,-208.411 ccw(c188.709,-208.204) 188.709,-208.497 ; U7.6@190.193,-209.147 U7.7@190.193,-208.497 ; U4.39@206.995,-175.816 208.125,-175.816 209.194,-176.886 209.194,-181.458 207.543,-183.109 196.952,-183.109 195.605,-184.455 195.605,-206.756 193.864,-208.497 193.331,-208.497 U7.7@190.193,-208.497
  Bottom Layer w0.254: v1(188.412,-208.501) 190.518,-208.501 191.287,-209.271 202.717,-209.271 205.324,-206.664 205.324,-205.363 206.665,-204.023 C29.2@206.779,-204.023 ; v1@188.502,-208.591 cw(c188.719,-208.808) 188.719,-208.501 cw(c188.719,-208.195) v1@188.502,-208.411
MAIN7: C22.2 U4.40 U7.1 U7.2 | length 77.9
  Top Layer w0.254: v1(188.953,-212.397) U7.1@190.193,-212.397 U7.2@190.193,-211.747 192.494,-211.747 194.449,-211.747 196.291,-209.906 196.291,-184.556 197.358,-183.49 207.924,-183.49 209.575,-181.839 209.575,-176.378 208.514,-175.316 U4.40@206.995,-175.316 ; v1@189.043,-212.487 cw(c189.26,-212.704) 189.26,-212.397 cw(c189.26,-212.091) v1@189.043,-212.308
  Bottom Layer w0.254: v1(188.953,-212.397) 194.978,-212.397 196.494,-210.881 C22.2@206.906,-210.881 ; v1@189.043,-212.487 cw(c189.26,-212.704) 189.26,-212.397 cw(c189.26,-212.091) v1@189.043,-212.308 ; C22.2@206.492,-211.144 ccw(c205.855,-211.781) 205.855,-210.881 ccw(c205.855,-209.98) C22.2@206.492,-210.617
MAIN8: C30.2 U4.38 U7.8 U7.9 | length 77.1
  Top Layer w0.254: 186.019,-209.147 ccw(c186.019,-208.828) v1@186.245,-209.054 ; 186.037,-209.147 cw(c186.037,-209.441) v1@186.245,-209.233 ; v1(186.334,-209.144) 186.331,-209.147 U7.9@184.554,-209.147 U7.8@184.554,-208.497 185.813,-207.239 193.497,-207.239 195.021,-205.715 195.021,-184.201 196.494,-182.728 207.162,-182.728 208.813,-181.077 208.813,-177.14 207.99,-176.316 U4.38@206.995,-176.316
  Bottom Layer w0.254: v1@186.245,-209.233 cw(c186.028,-209.45) 186.334,-209.45 cw(c186.641,-209.45) v1@186.424,-209.233 ; v1(186.334,-209.144) 186.334,-212.192 188.112,-213.97 194.396,-213.97 196.469,-211.897 C30.2@199.669,-211.897 ; C30.2@199.256,-212.16 ccw(c198.619,-212.797) 198.619,-211.897 ccw(c198.619,-210.996) C30.2@199.256,-211.633
MB_RX1: R227.1 U12.3 U44.15 | length 135.7
  Top Layer w0.254: v1@124.599,-194.601 ccw(c124.382,-194.384) 124.689,-194.384 ccw(c124.995,-194.384) v1@124.778,-194.601 ; v1(124.689,-194.691) 124.689,-188.824 125.334,-188.178 U44.15@126.591,-188.178 ; v1(144.856,-194.691) 145.39,-194.158 v1(166.929,-194.158) ; v1@144.856,-194.564 ccw(c144.856,-194.257) 145.073,-194.474 ccw(c145.29,-194.691) v1@144.983,-194.691 ; v1@166.839,-194.247 ccw(c166.622,-194.464) 166.622,-194.158 ccw(c166.622,-193.851) v1@166.839,-194.068 ; v1@167.779,-158.355 ccw(c167.562,-158.139) 167.869,-158.139 ccw(c168.175,-158.139) v1@167.958,-158.355 ; v1(167.869,-158.445) 167.869,-131.953 v1@169.113,-130.708 ; v1@169.037,-130.658 cw(c168.73,-130.658) 168.947,-130.874 cw(c169.164,-131.091) v1@169.164,-130.785 ; v1@179.514,-130.568 ccw(c179.119,-130.173) 179.677,-130.173 ; U12.3@179.59,-129.742 cw(c179.38,-129.952) 179.677,-129.952 cw(c179.974,-129.952) U12.3@179.764,-129.742 ; v1@179.677,-130.584 U12.3@179.677,-128.905
  Bottom Layer w0.254: v1@124.714,-194.666 137.726,-194.666 ; v1@124.778,-194.781 cw(c125.057,-195.059) 125.057,-194.666 ; 137.751,-194.691 v1(144.856,-194.691) ; v1@144.766,-194.781 ccw(c144.55,-194.998) 144.55,-194.691 ccw(c144.55,-194.384) v1@144.766,-194.601 ; v1(166.929,-194.158) 166.929,-194.056 167.284,-193.7 167.284,-159.029 v1(167.869,-158.445) ; v1@167.056,-194.158 cw(c167.608,-194.158) 167.217,-193.767 ; v1@167.742,-158.445 cw(c167.435,-158.445) 167.652,-158.662 cw(c167.869,-158.879) v1@167.869,-158.572 ; v1@169.113,-130.708 v1(169.164,-130.658) v1(179.603,-130.658) R227.1@179.603,-129.261 ; v1@169.254,-130.747 cw(c169.471,-130.964) 169.471,-130.658 cw(c169.471,-130.351) v1@169.254,-130.568 ; R227.1@179.446,-129.418 cw(c179.065,-129.799) 179.603,-129.799 cw(c180.142,-129.799) R227.1@179.761,-129.418 ; v1@179.514,-130.747 ccw(c179.297,-130.964) 179.297,-130.658 ccw(c179.297,-130.351) 179.514,-130.568 ccw(c179.297,-130.351) 179.603,-130.351 ccw(c179.91,-130.351) v1@179.693,-130.568
MB_RX1_N: D79.2 F7.2 P23.2 R110.1 | length 14.5
  Top Layer w0.254: P23.2@180.16,-103.024 181.176,-104.04 181.176,-107.671 R110.1@180.769,-108.077 180.769,-109.247 ccw(c181.109,-109.587) F7.2@180.7,-109.839
  Bottom Layer w0.254: D79.2@179.245,-108.835 181.178,-106.902 181.178,-104.043 P23.2@180.16,-103.024
MB_RX1_P: D78.2 F8.2 P23.1 R110.2 | length 16.7
  Top Layer w0.254: R110.2@182.112,-108.31 cw(c181.731,-108.69) 182.269,-108.69 cw(c182.808,-108.69) R110.2@182.427,-108.31 ; 182.403,-109.357 cw(c181.854,-109.906) F8.2@182.615,-110.061 ; P23.1@182.7,-103.124 181.684,-104.14 181.684,-107.491 R110.2@182.269,-108.077 182.269,-109.223 F8.2@183.131,-110.085
  Bottom Layer w0.254: P23.1@182.7,-103.124 181.686,-104.137 181.686,-106.577 D78.2@183.944,-108.835
MB_RXEN1: R76.1 U12.4 U12.5 U44.56 | length 109
  Top Layer w0.254: v1@133.001,-180.687 ccw(c132.784,-180.47) 133.091,-180.47 ccw(c133.398,-180.47) v1@133.181,-180.687 ; v1(133.091,-180.777) U44.56@133.091,-178.678 ; v1(134.163,-174.041) 152.298,-174.041 153.264,-175.006 v1(161.798,-175.006) ; v1@134.253,-174.131 cw(c134.469,-174.347) 134.469,-174.041 cw(c134.469,-173.734) v1@134.253,-173.951 ; v1@161.708,-175.096 ccw(c161.491,-175.313) 161.491,-175.006 ccw(c161.491,-174.699) v1@161.708,-174.916 ; U12.4@180.947,-128.905 U12.5@182.217,-128.905 182.217,-130.604 v1(182.27,-130.658) ; U12.4@181.034,-128.992 cw(c181.244,-129.202) 181.244,-128.905 cw(c181.244,-128.608) U12.4@181.034,-128.818 ; U12.5@182.13,-129.742 cw(c181.92,-129.952) 182.217,-129.952 cw(c182.514,-129.952) U12.5@182.304,-129.742 ; U12.5@182.13,-128.992 ccw(c181.92,-129.202) 181.92,-128.905 ccw(c181.92,-128.608) U12.5@182.13,-128.818 ; 182.217,-130.222 ccw(c182.706,-130.222) v1@182.36,-130.568
  Bottom Layer w0.254: v1(133.091,-180.777) 134.645,-179.222 134.645,-175.888 134.163,-175.405 v1(134.163,-174.041) ; v1@133.091,-180.65 ccw(c133.091,-180.343) 133.308,-180.56 ccw(c133.525,-180.777) v1@133.218,-180.777 ; v1@134.073,-174.131 cw(c133.856,-174.347) 134.163,-174.347 cw(c134.469,-174.347) v1@134.253,-174.131 ; v1@161.708,-174.916 ccw(c161.491,-174.699) 161.798,-174.699 ccw(c162.105,-174.699) v1@161.888,-174.916 ; v1(161.798,-175.006) 161.798,-138.328 168.859,-131.267 181.661,-131.267 v1(182.27,-130.658) R76.1@182.27,-129.261 ; R76.1@182.113,-129.418 cw(c181.732,-129.799) 182.27,-129.799 cw(c182.809,-129.799) R76.1@182.428,-129.418 ; v1@182.143,-130.658 cw(c181.837,-130.658) 182.054,-130.874 cw(c182.27,-131.091) v1@182.27,-130.785 ; v1@182.181,-130.568 ccw(c181.964,-130.351) 182.27,-130.351 ccw(c182.577,-130.351) v1@182.36,-130.568
MB_TX1: U12.6 U44.14 | length 137.8
  Top Layer w0.254: v1@124.091,-194.017 ccw(c123.874,-193.8) 124.181,-193.8 ccw(c124.487,-193.8) v1@124.27,-194.017 ; v1(124.181,-194.107) 124.181,-188.793 125.295,-187.678 U44.14@126.591,-187.678 U44.14@126.583,-187.67 ; v1(145.796,-194.691) 167.361,-194.691 v1(167.386,-194.716) ; v1@145.886,-194.781 cw(c146.103,-194.998) 146.103,-194.691 cw(c146.103,-194.384) v1@145.886,-194.601 ; 167.018,-194.691 cw(c167.018,-195.084) v1@167.296,-194.806 ; v1(167.843,-159.283) 168.377,-158.75 168.377,-132.688 v1(169.277,-131.788) ; v1@167.843,-159.156 ccw(c167.843,-158.85) 168.06,-159.067 ccw(c168.277,-159.283) v1@167.97,-159.283 ; v1@169.15,-131.788 cw(c168.843,-131.788) 169.06,-132.005 cw(c169.277,-132.221) v1@169.277,-131.915 ; v1@183.397,-130.619 ccw(c183.18,-130.402) 183.487,-130.402 ccw(c183.794,-130.402) v1@183.577,-130.619 ; U12.6@183.4,-129.742 cw(c183.19,-129.952) 183.487,-129.952 cw(c183.784,-129.952) U12.6@183.574,-129.742 ; v1(183.487,-130.708) U12.6@183.487,-128.905
  Bottom Layer w0.254: v1(124.181,-194.107) 145.212,-194.107 v1(145.796,-194.691) ; v1@124.27,-194.197 cw(c124.487,-194.413) 124.487,-194.107 cw(c124.487,-193.8) v1@124.27,-194.017 ; v1@145.669,-194.691 ccw(c145.362,-194.691) 145.579,-194.474 ccw(c145.796,-194.257) v1@145.796,-194.564 ; v1(167.386,-194.716) 167.792,-194.31 167.792,-159.334 v1(167.843,-159.283) ; v1@167.386,-194.589 ccw(c167.386,-194.283) 167.603,-194.5 ccw(c167.82,-194.716) v1@167.513,-194.716 ; 167.792,-159.713 cw(c168.272,-159.713) v1@167.933,-159.373 ; v1(169.277,-131.788) 182.408,-131.788 v1(183.487,-130.708) ; v1@169.367,-131.878 cw(c169.584,-132.094) 169.584,-131.788 cw(c169.584,-131.481) v1@169.367,-131.698 ; v1@183.36,-130.708 cw(c183.053,-130.708) 183.27,-130.925 cw(c183.487,-131.142) v1@183.487,-130.835
MC\S\1: U4.27 U18.14 | length 27.2
  Top Layer w0.254: U18.14@184.732,-173.965 v1(187.02,-173.965) ; U18.14@185.716,-174.072 cw(c185.976,-174.333) 185.976,-173.965 cw(c185.976,-173.597) U18.14@185.716,-173.857 ; v1@186.93,-174.054 ccw(c186.714,-174.271) 186.714,-173.965 ccw(c186.714,-173.658) v1@186.93,-173.875 ; v1@187.503,-179.146 cw(c187.503,-179.453) 187.72,-179.236 cw(c187.936,-179.019) v1@187.63,-179.019 ; v1(187.503,-179.019) 188.011,-179.527 190.627,-179.527 ; 190.043,-179.527 190.627,-179.527 ; 197.942,-179.527 198.272,-179.527 ; U4.27@201.795,-177.516 201.795,-179.027 201.295,-179.527 198.272,-179.527 ; 190.627,-179.527 198.272,-179.527
  Bottom Layer w0.254: v1@186.93,-174.054 cw(c186.714,-174.271) 187.02,-174.271 cw(c187.327,-174.271) v1@187.11,-174.054 ; v1@187.02,-173.99 187.02,-178.537 v1(187.503,-179.019) ; v1@187.376,-179.019 ccw(c187.069,-179.019) 187.286,-178.802 ccw(c187.503,-178.586) v1@187.503,-178.892
MC\S\_PT1: U10.14 U54.27 | length 21.7
  Top Layer w0.254: U10.14@184.732,-157.709 194.996,-157.709 198.679,-154.026 201.778,-154.026 202.311,-153.492 202.311,-151.743 U54.27@202.303,-151.735 ; U10.14@185.716,-157.816 cw(c185.976,-158.077) 185.976,-157.709 cw(c185.976,-157.341) U10.14@185.716,-157.601
MC\S\_PT2: U10.13
MD\R\D\Y\: U4.25 U9.5 | length 52.9
  Top Layer w0.254: U9.5@184.859,-144.501 187.452,-144.501 188.392,-145.44 188.392,-152.324 v1(188.9,-152.832) ; U9.5@185.843,-144.608 cw(c186.103,-144.869) 186.103,-144.501 cw(c186.103,-144.133) U9.5@185.843,-144.393 ; v1@188.417,-177.952 cw(c188.417,-178.259) 188.634,-178.042 cw(c188.851,-177.825) v1@188.544,-177.825 ; v1(188.417,-177.825) 189.281,-178.689 200.482,-178.689 200.795,-178.376 U4.25@200.795,-177.516 ; v1@188.773,-152.832 ccw(c188.466,-152.832) 188.683,-152.615 ccw(c188.9,-152.398) v1@188.9,-152.705
  Bottom Layer w0.254: v1@188.327,-177.736 ccw(c188.111,-177.519) 188.417,-177.519 ccw(c188.724,-177.519) v1@188.507,-177.736 ; v1(188.417,-177.825) 188.417,-154.356 188.417,-153.314 v1(188.9,-152.832) ; v1@188.773,-152.832 cw(c188.466,-152.832) 188.683,-153.049 cw(c188.9,-153.265) v1@188.9,-152.959
MD\R\D\Y\_MCU: U9.12 U44.27 | length 95
  Top Layer w0.254: U44.27@134.091,-191.178 134.091,-192.638 135.179,-193.726 142.773,-193.726 143.713,-192.786 162.89,-192.786 ; 163.855,-192.786 162.89,-192.786 ; v1@168.58,-192.075 cw(c168.273,-192.075) 168.49,-192.292 cw(c168.707,-192.508) v1@168.707,-192.202 ; v1(168.631,-160.452) 169.748,-159.334 169.748,-145.745 170.993,-144.501 U9.12@175.816,-144.501 ; v1@168.631,-160.325 ccw(c168.631,-160.018) 168.847,-160.235 ccw(c169.064,-160.452) v1@168.758,-160.452 ; v1(168.707,-192.075) 167.996,-192.786 167.488,-192.786 162.89,-192.786 ; U9.12@174.832,-144.608 ccw(c174.572,-144.869) 174.572,-144.501 ccw(c174.572,-144.133) U9.12@174.832,-144.393
  Bottom Layer w0.254: v1@168.631,-160.579 cw(c168.631,-160.885) 168.847,-160.669 cw(c169.064,-160.452) v1@168.758,-160.452 ; v1(168.631,-160.452) 169.774,-161.595 169.774,-191.008 v1(168.707,-192.075) ; v1@168.707,-191.948 ccw(c168.707,-191.641) 168.924,-191.858 ccw(c169.14,-192.075) v1@168.834,-192.075
MD\R\D\Y\_PT1: U9.4 U54.25 | length 26.5
  Top Layer w0.254: U9.4@184.859,-145.771 v1(186.969,-145.771) ; U9.4@185.843,-145.878 cw(c186.103,-146.139) 186.103,-145.771 cw(c186.103,-145.403) U9.4@185.843,-145.663 ; v1@186.88,-145.86 ccw(c186.663,-146.077) 186.663,-145.771 ccw(c186.663,-145.464) v1@186.88,-145.681 ; v1@189.47,-145.86 cw(c189.254,-146.077) 189.56,-146.077 cw(c189.867,-146.077) v1@189.65,-145.86 ; v1(189.56,-145.771) 189.56,-152.039 190.48,-152.959 200.711,-152.959 201.303,-152.367 U54.25@201.303,-151.735
  Bottom Layer w0.254: v1(186.969,-145.771) v1(189.56,-145.771) ; v1@187.059,-145.86 cw(c187.276,-146.077) 187.276,-145.771 cw(c187.276,-145.464) v1@187.059,-145.681 ; v1@189.47,-145.86 ccw(c189.254,-146.077) 189.254,-145.771 ccw(c189.254,-145.464) v1@189.47,-145.681
MD\R\D\Y\_PT1_MCU: U9.13 U44.28 | length 90.7
  Top Layer w0.254: U44.28@134.591,-191.178 134.591,-192.554 135.382,-193.345 142.418,-193.345 143.485,-192.278 164.16,-192.278 ; 164.389,-192.278 164.16,-192.278 ; v1@168.529,-191.389 cw(c168.222,-191.389) 168.439,-191.606 cw(c168.656,-191.823) v1@168.656,-191.516 ; v1(168.58,-161.239) 170.383,-159.436 170.383,-147.396 172.009,-145.771 U9.13@175.816,-145.771 ; v1@168.58,-161.112 ccw(c168.58,-160.806) 168.797,-161.022 ccw(c169.013,-161.239) v1@168.707,-161.239 ; v1(168.656,-191.389) 167.767,-192.278 164.16,-192.278 ; U9.13@174.832,-145.878 ccw(c174.572,-146.139) 174.572,-145.771 ccw(c174.572,-145.403) U9.13@174.832,-145.663
  Bottom Layer w0.254: v1@168.58,-161.366 cw(c168.58,-161.673) 168.797,-161.456 cw(c169.013,-161.239) v1@168.707,-161.239 ; v1(168.58,-161.239) 169.215,-161.874 169.215,-190.83 v1(168.656,-191.389) ; v1@168.656,-191.262 ccw(c168.656,-190.955) 168.873,-191.172 ccw(c169.09,-191.389) v1@168.783,-191.389
MD\R\D\Y\_PT2: U9.3
MD\R\D\Y\_PT2_MCU: U9.14 U44.29 | length 87
  Top Layer w0.254: U44.29@135.091,-191.178 135.091,-192.292 135.763,-192.964 141.834,-192.964 143.053,-191.745 167.513,-191.745 v1(168.605,-190.652) ; v1@168.478,-190.652 cw(c168.172,-190.652) 168.388,-190.869 cw(c168.605,-191.086) v1@168.605,-190.779 ; v1(168.605,-162.027) 170.967,-159.664 170.967,-148.488 172.415,-147.041 U9.14@175.816,-147.041 ; v1@168.605,-161.9 ccw(c168.605,-161.593) 168.822,-161.81 ccw(c169.039,-162.027) v1@168.732,-162.027 ; U9.14@174.832,-147.148 ccw(c174.572,-147.409) 174.572,-147.041 ccw(c174.572,-146.673) U9.14@174.832,-146.933
  Bottom Layer w0.254: v1@168.515,-190.563 ccw(c168.299,-190.346) 168.605,-190.346 ccw(c168.912,-190.346) v1@168.695,-190.563 ; v1@168.515,-162.116 cw(c168.299,-162.333) 168.605,-162.333 cw(c168.912,-162.333) v1@168.695,-162.116 ; v1(168.605,-190.652) v1(168.605,-162.027)
MIBSPI1CLK: U18.4 U44.51 | length 48
  Top Layer w0.254: U44.51@135.591,-178.678 135.591,-176.829 136.449,-175.971 150.927,-175.971 153.543,-178.587 v1(160.934,-178.587) ; v1@160.845,-178.677 ccw(c160.628,-178.894) 160.628,-178.587 ccw(c160.628,-178.281) v1@160.845,-178.498 ; v1@160.96,-176.759 172.288,-176.759 173.812,-175.235 U18.4@175.689,-175.235 ; v1@161.05,-176.874 cw(c161.328,-177.152) 161.328,-176.759 ; U18.4@174.705,-175.342 ccw(c174.445,-175.603) 174.445,-175.235 ccw(c174.445,-174.867) U18.4@174.705,-175.127
  Bottom Layer w0.254: v1@160.845,-178.498 ccw(c160.566,-178.219) 160.96,-178.219 ; v1@160.87,-176.874 cw(c160.653,-177.091) 160.96,-177.091 cw(c161.266,-177.091) v1@161.05,-176.874 ; v1@160.96,-178.587 v1(160.96,-176.784)